# Altium PCB MCU_v2.PcbDoc
Units mm, origin at the board's own origin, x right, y up, seen from the top; angles counter-clockwise.
Board outline 60.75 x 70 mm, 4 copper layers (Top Layer, GND, +3V3, Bottom Layer), stack 1.513 mm thick; 73 components, 22 nets, 245 pads, 51 vias.
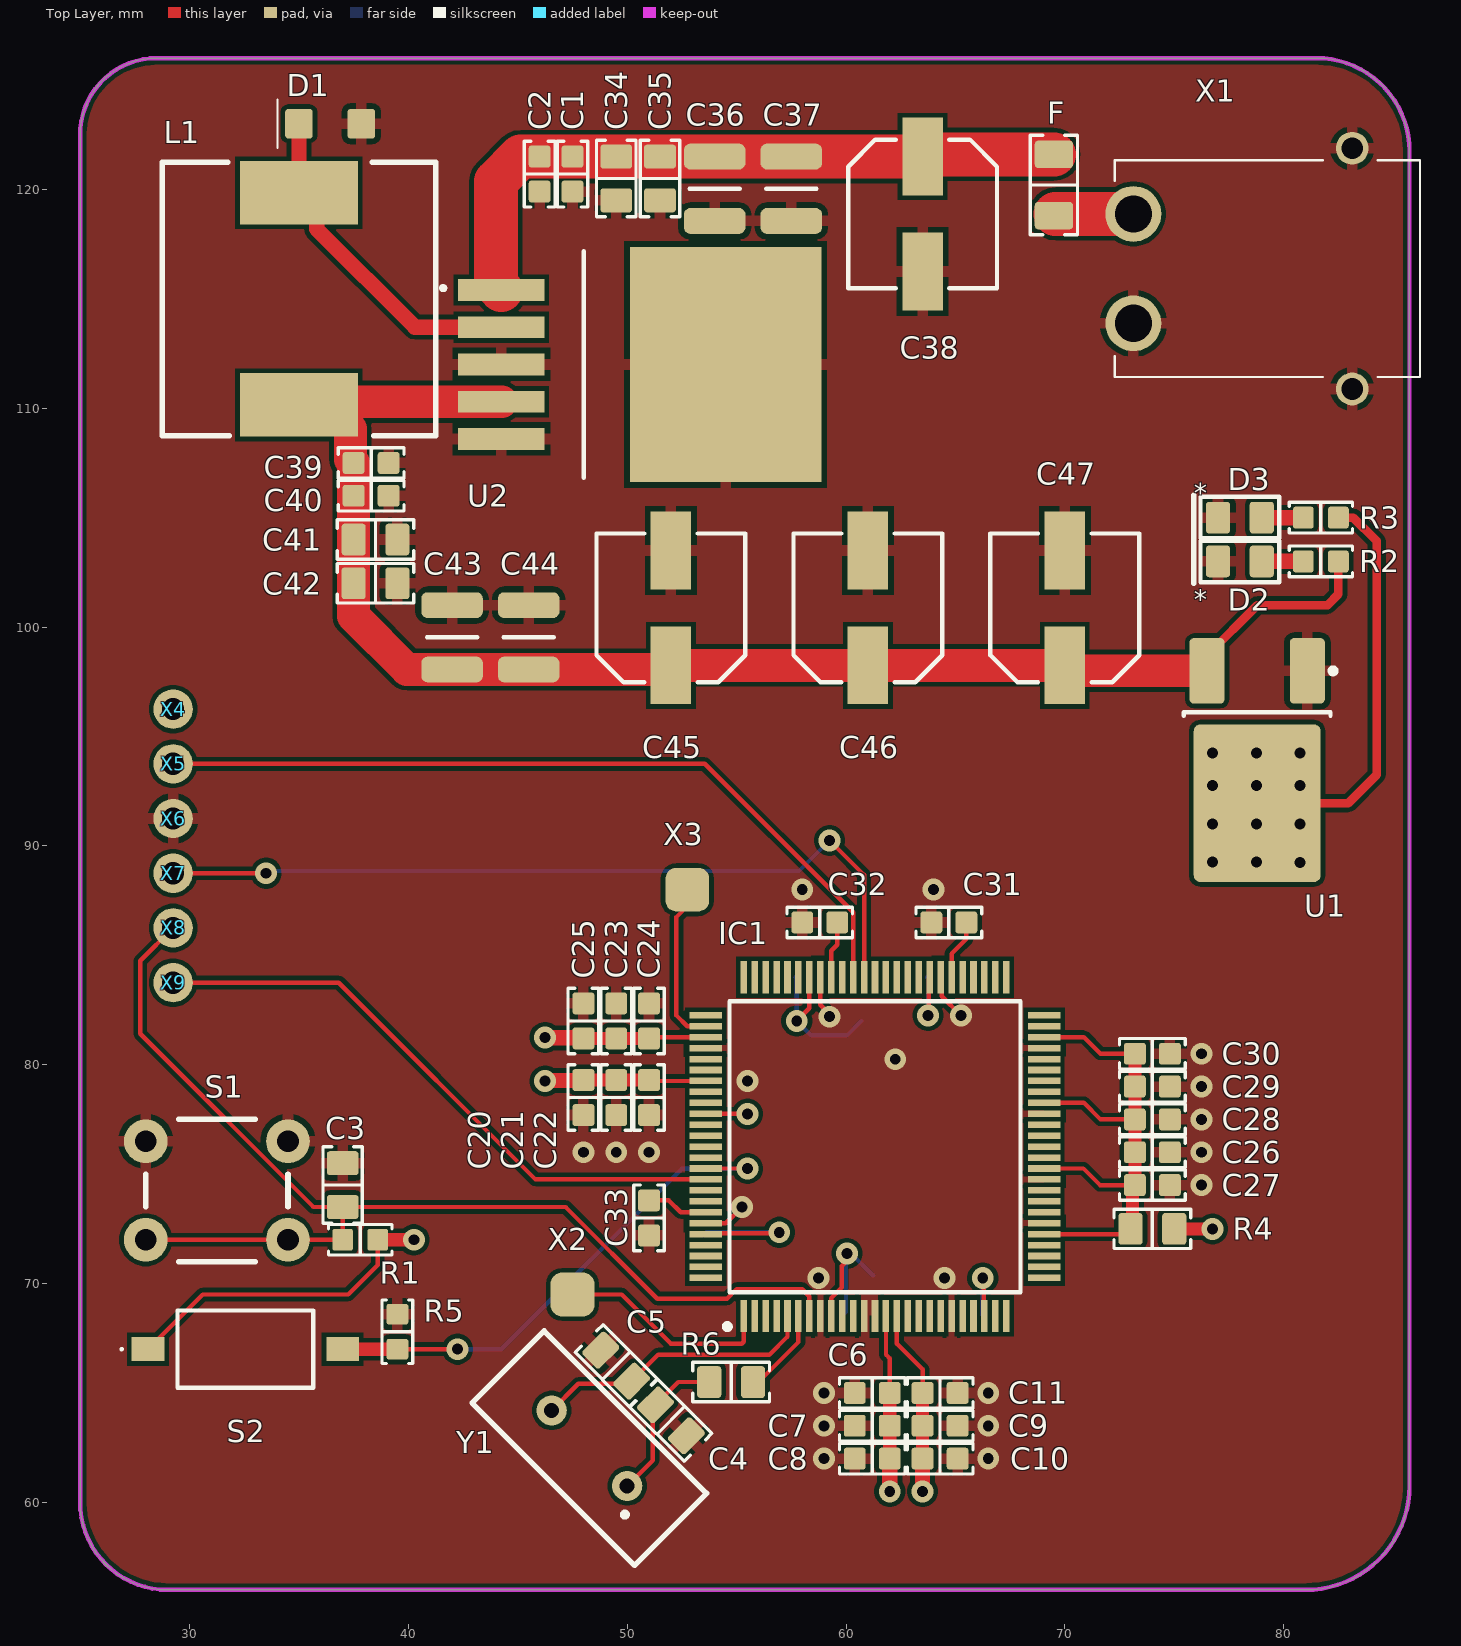
[diagram p0: Top Layer view]
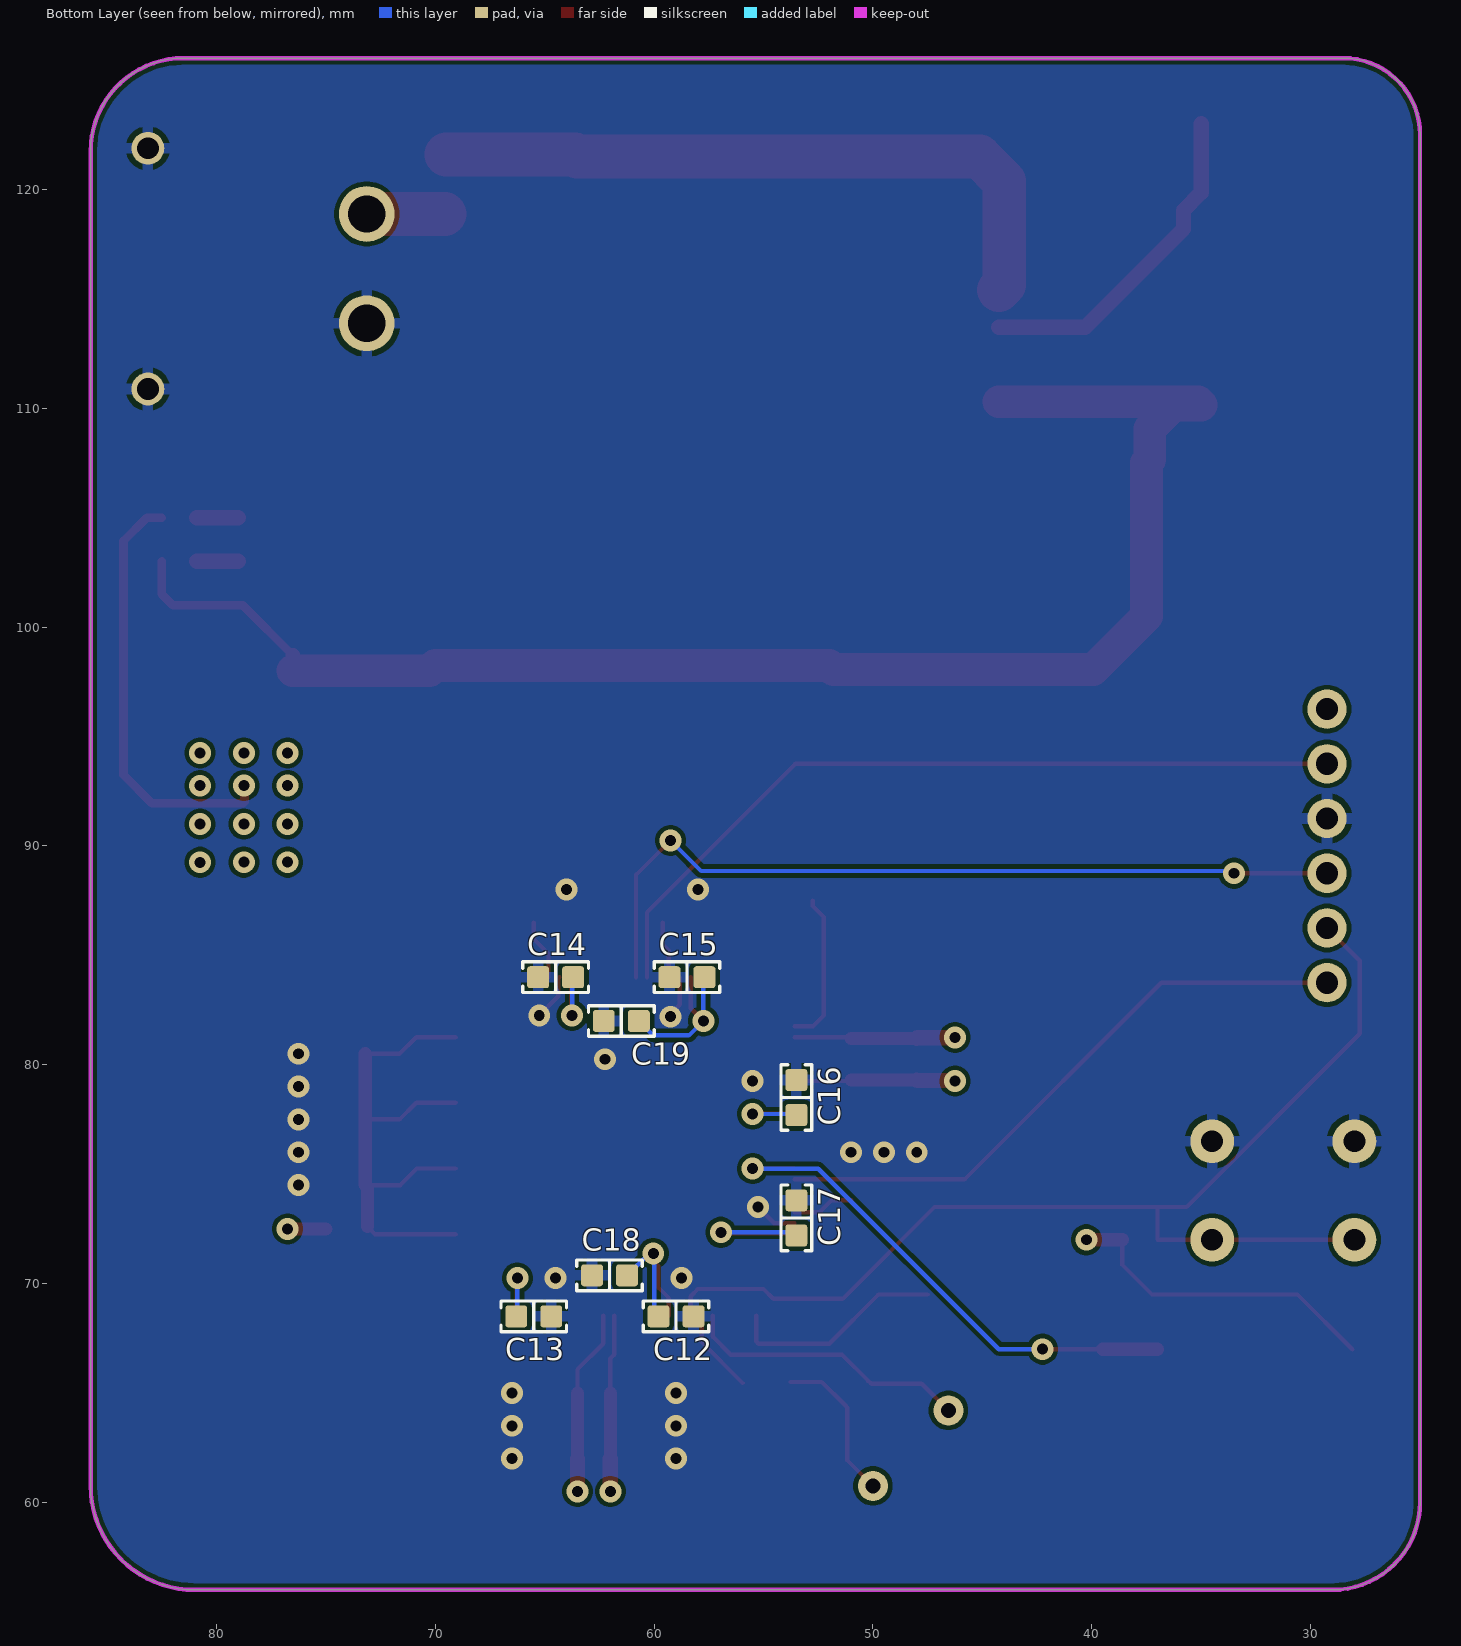
[diagram p1: Bottom Layer view, seen from below]
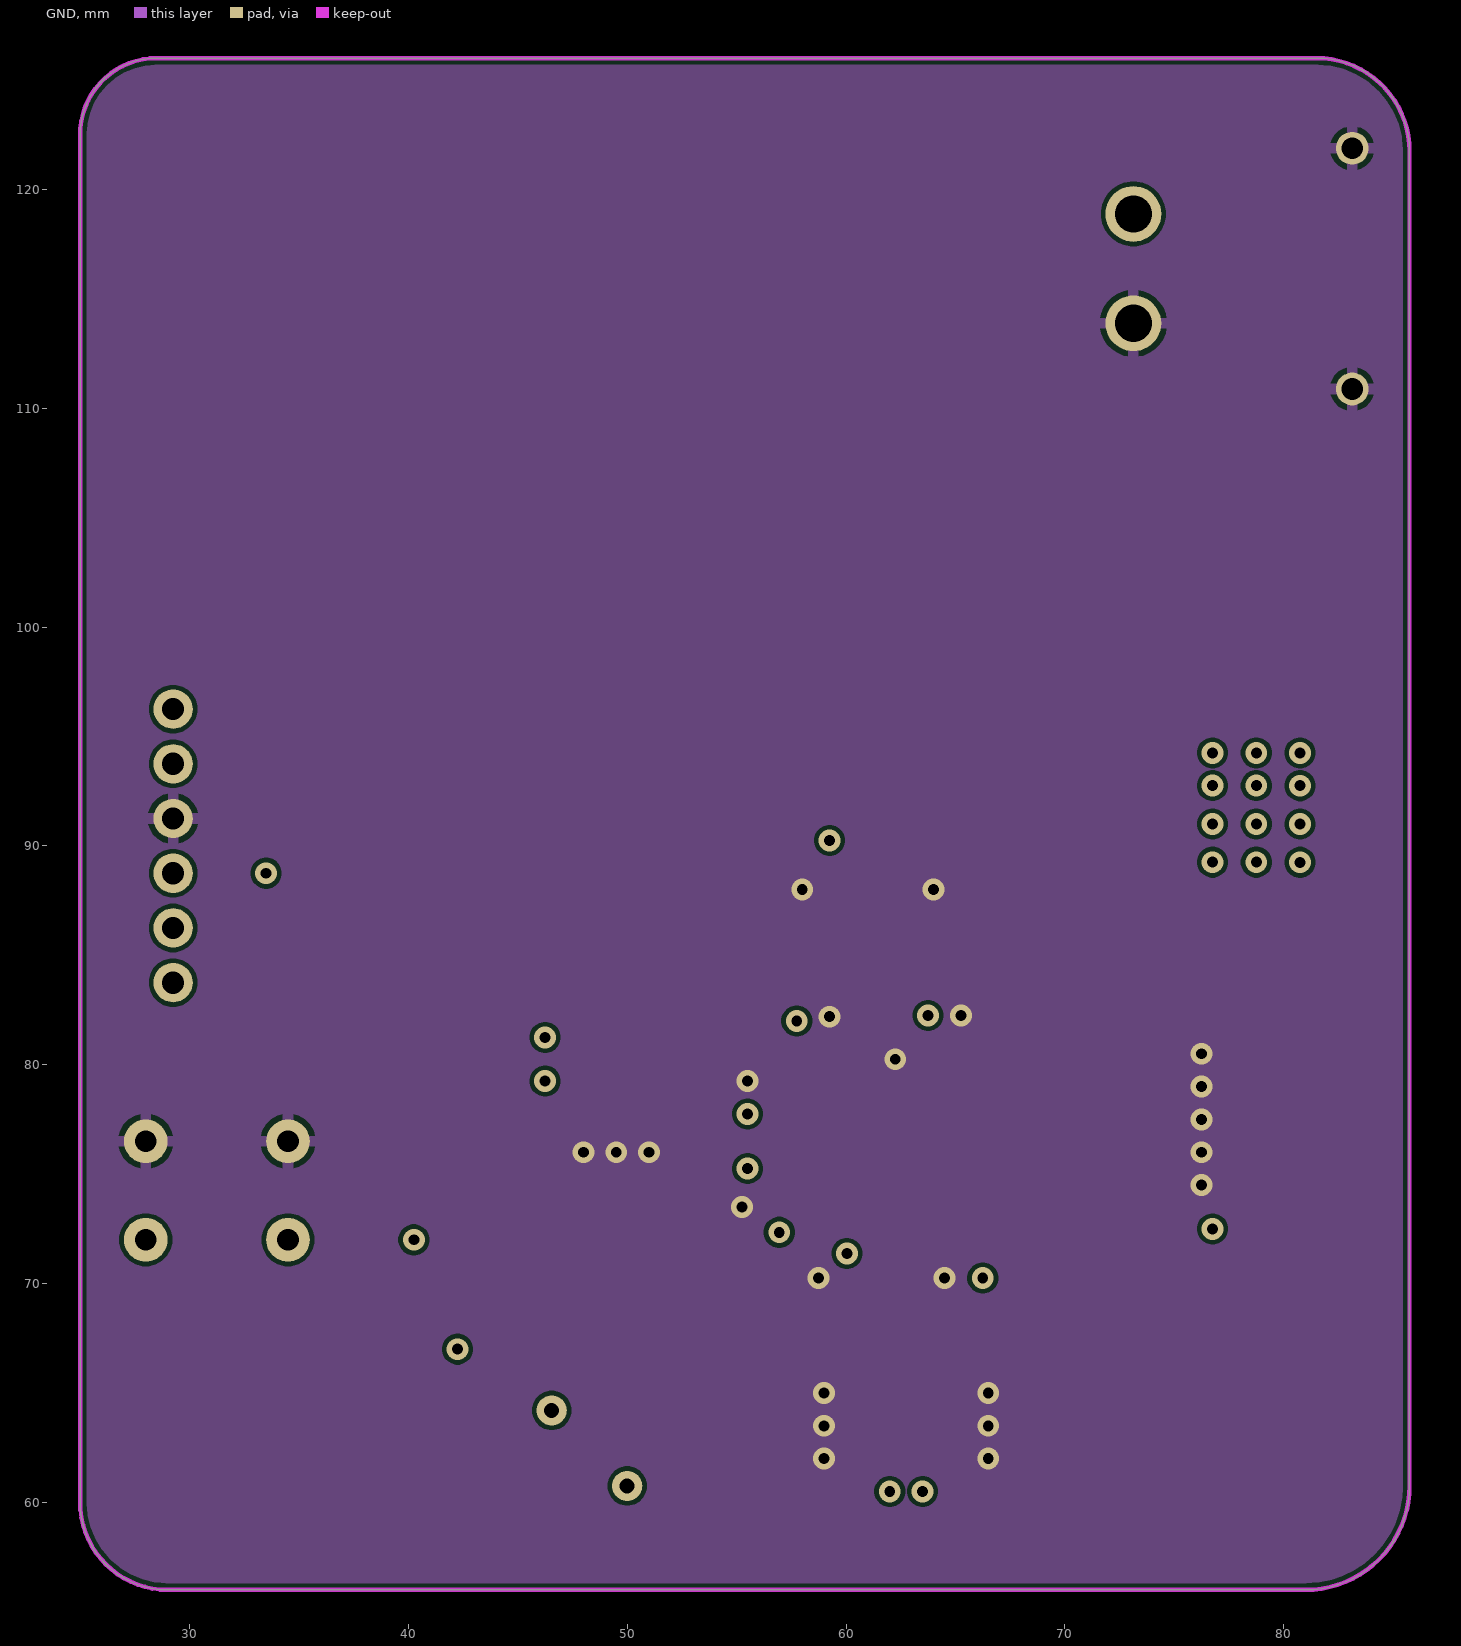
[diagram p2: GND]
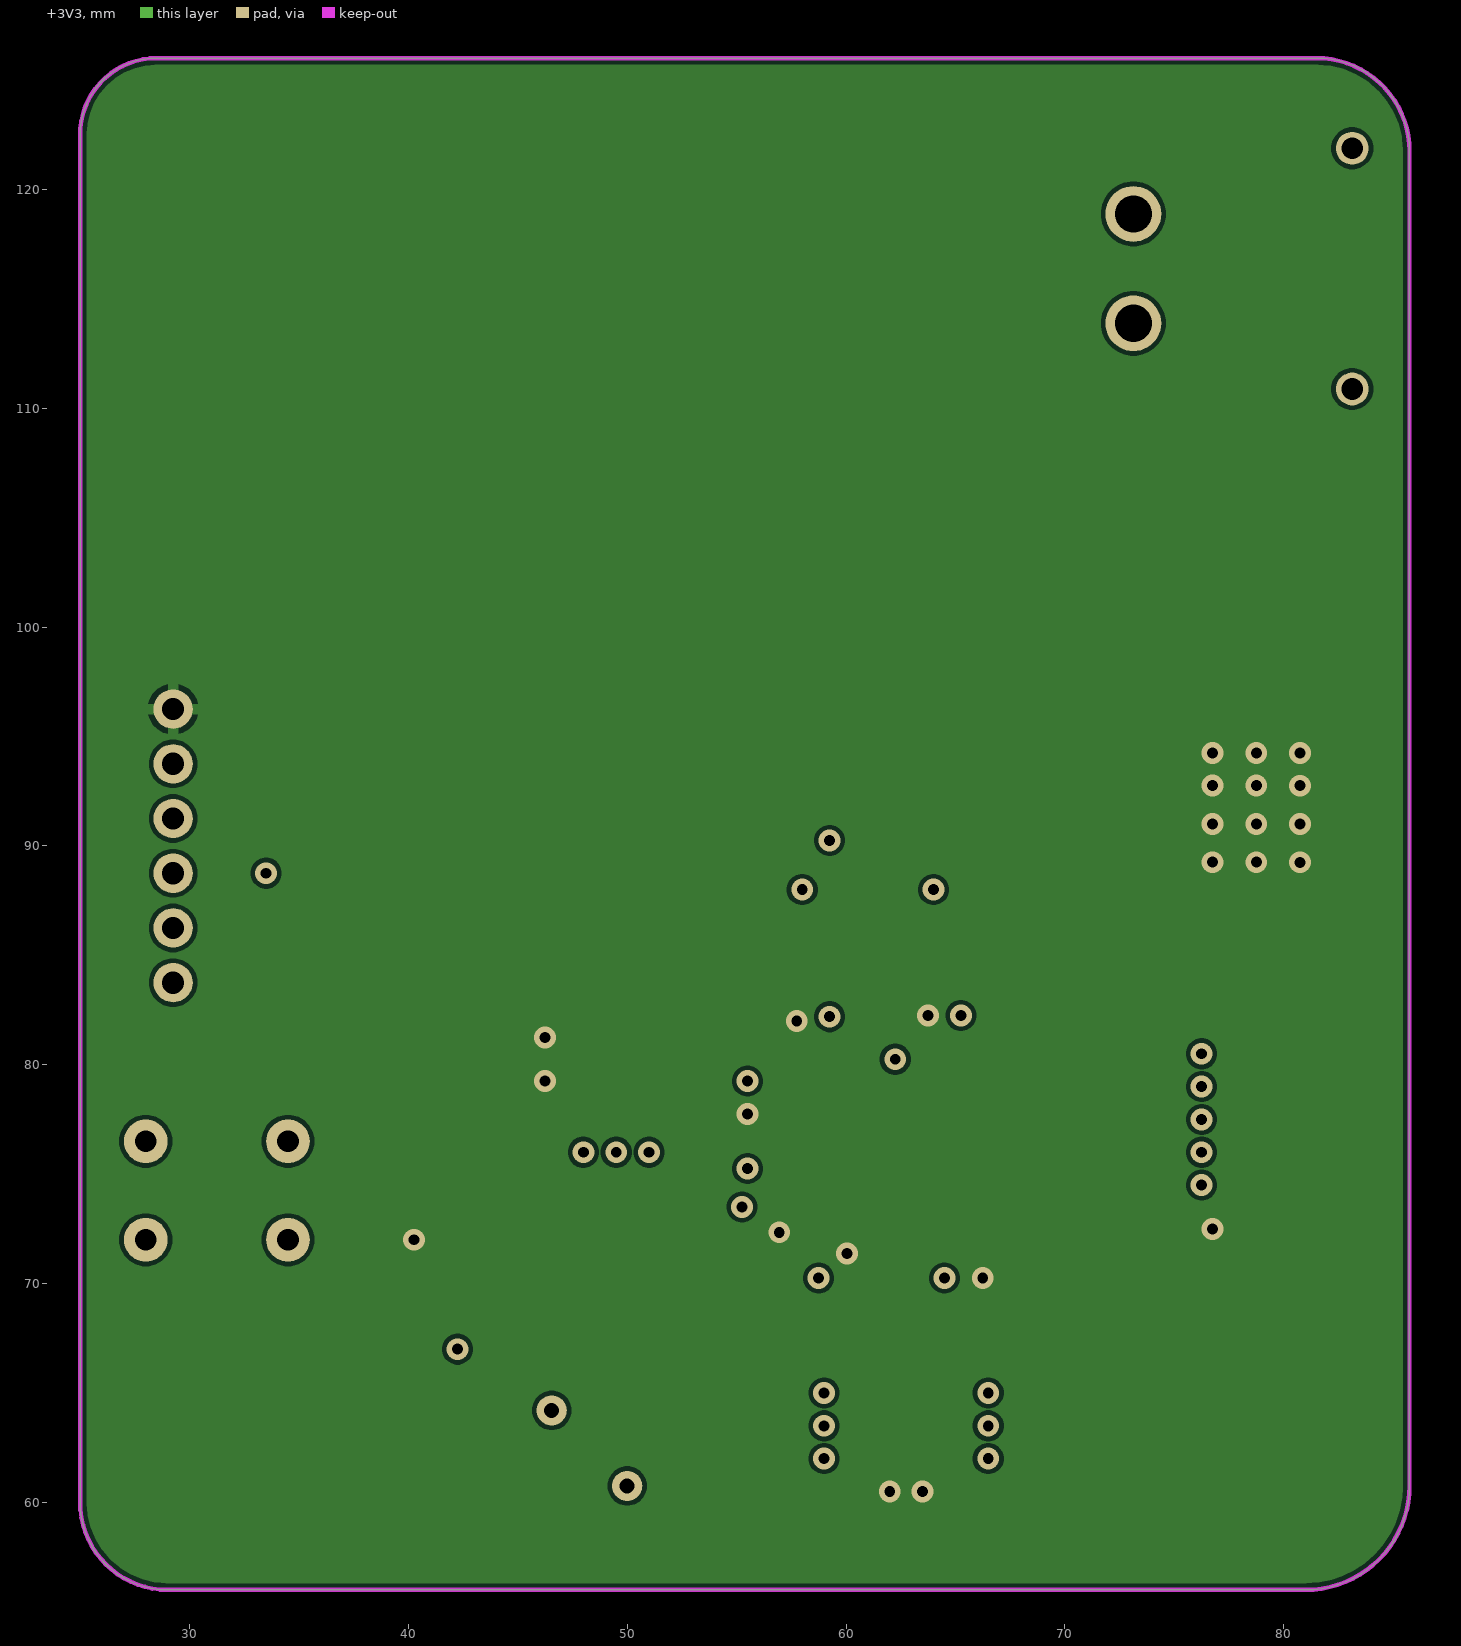
[diagram p3: +3V3]
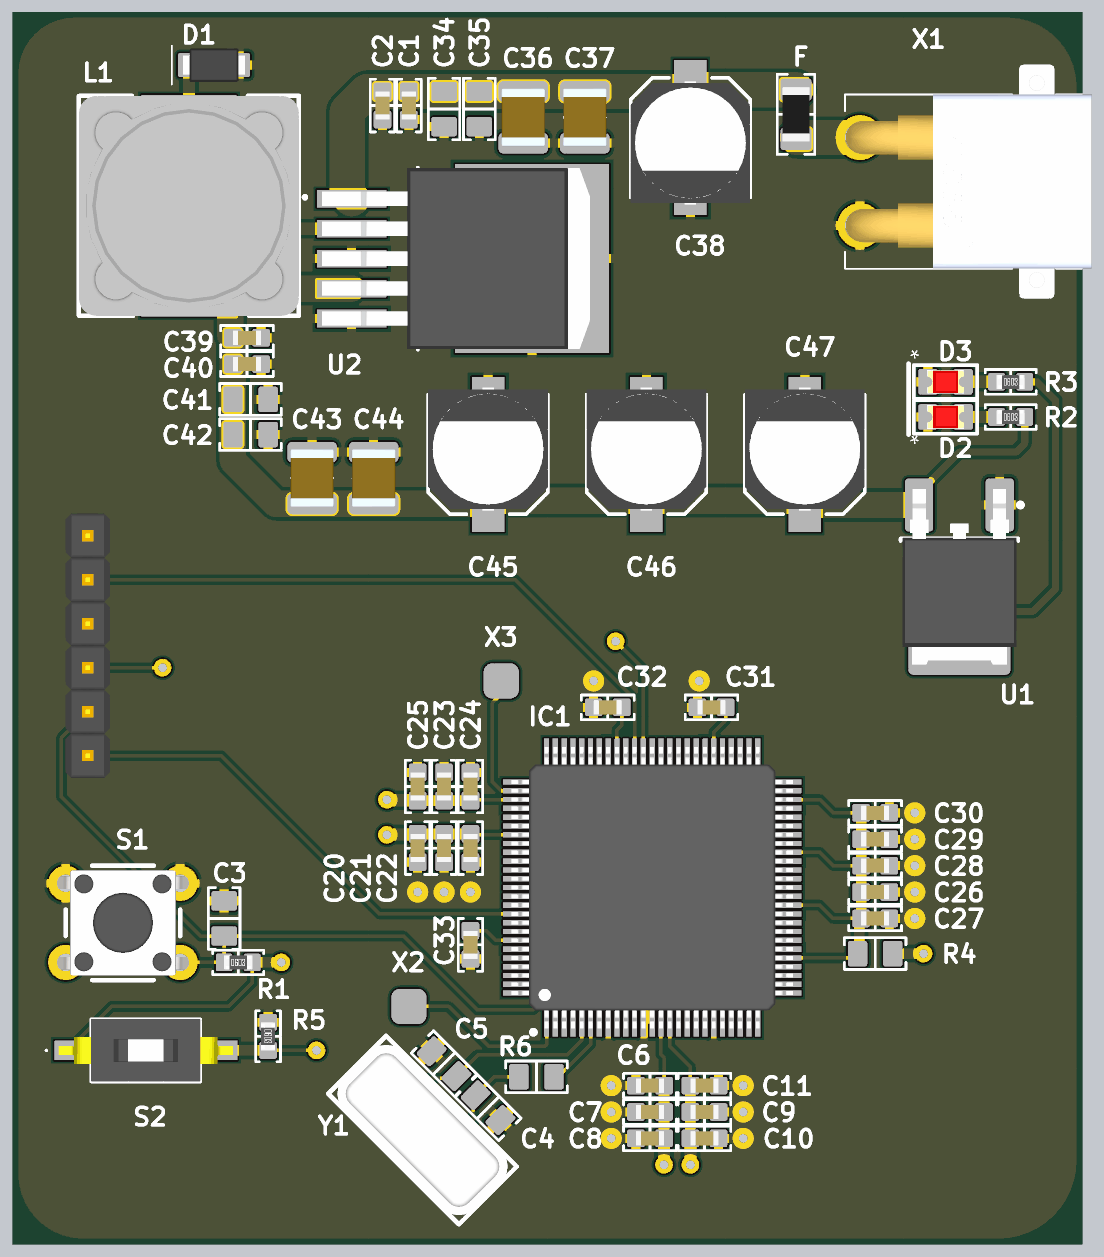
[diagram p4: 3D render of the assembled board from above, using the file's embedded part models]
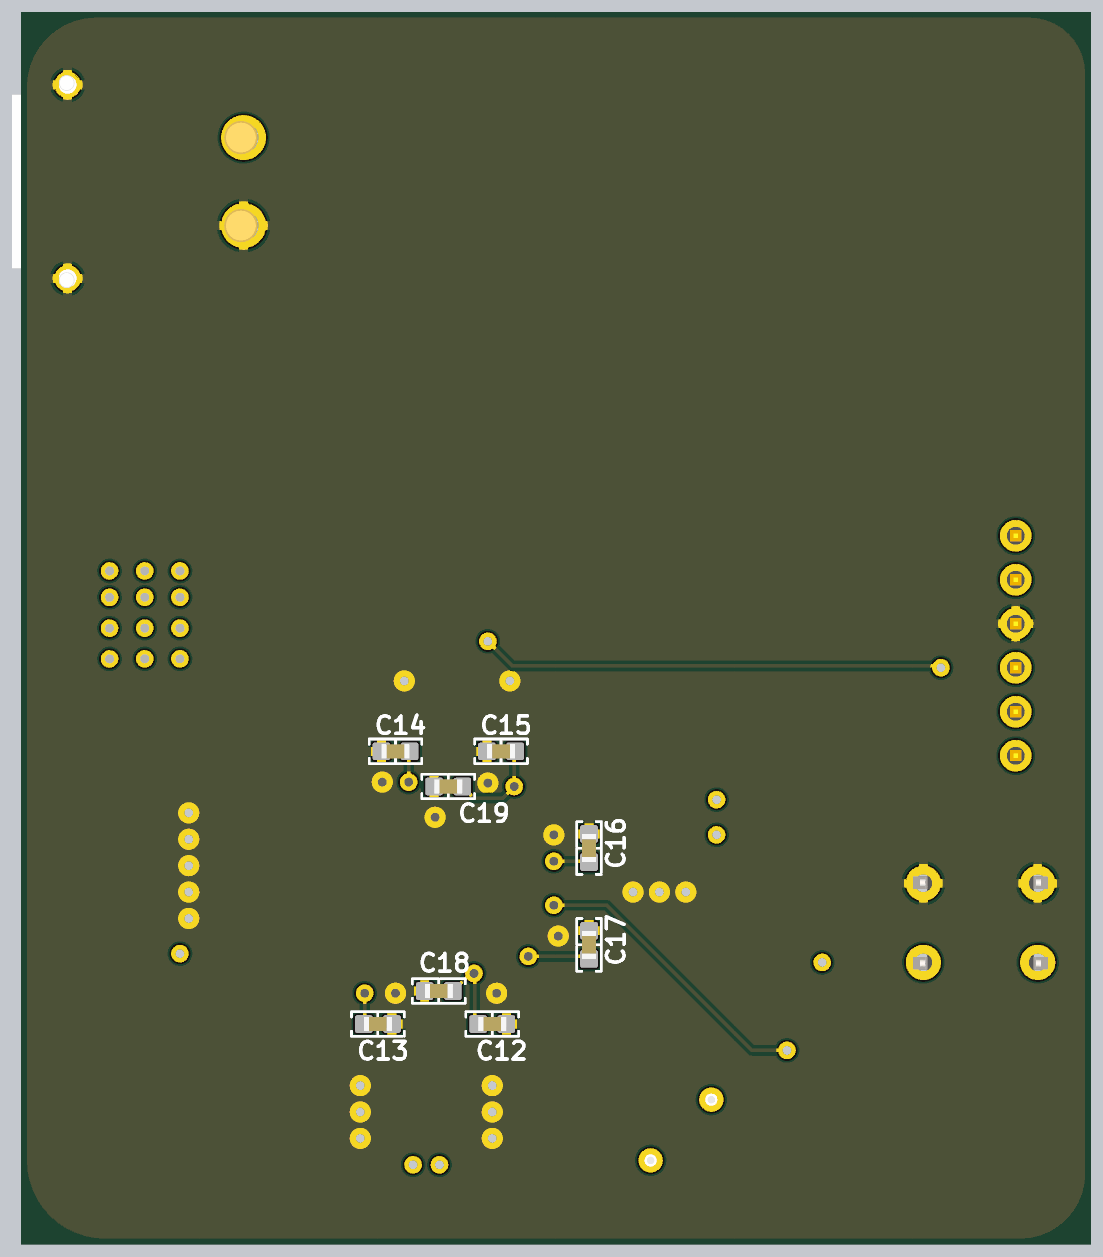
[diagram p5: 3D render of the assembled board from below, using the file's embedded part models]

## Layer stack, top to bottom
Top Solder: solder mask 0.0102, Solder Resist, Dk 3.5
Top Layer: signal copper 0.035
Dielectric 2: prepreg 0.2083, PP-022, Dk 4.5
GND: signal copper 0.018
Dielectric 1: core 0.9906, Core-042, Dk 4.6
+3V3: signal copper 0.018
Dielectric 3: prepreg 0.2083, PP-022, Dk 4.5
Bottom Layer: signal copper 0.035
Bottom Solder: solder mask 0.0102, Solder Resist, Dk 3.5

## Board outline
81.5,126 28.5,126 ccw(c28.5,122.5) 25,122.5 25,60 ccw(c29,60) 29,56 81,56 ccw(c81,60.75) 85.75,60.75 85.75,121.75 ccw(c81.5,121.75)

## Design rules (kind name [scope] priority, off if disabled: settings)
BoardOutlineClearance [All] p1: gap=0.3 ignorepadtopadclearanceinfootprint=FALSE except(0.4: Arc-SplitBarrior Arc-SplitContinuation Track-SplitBarrior Track-SplitContinuation SMDPad-SplitBarrior SMDPad-SplitContinuation THPad-SplitBarrior THPad-SplitContinuation Via-SplitBarrior Via-SplitContinuation Fill-SplitBarrior Fill-SplitContinuation Poly-SplitBarrior Poly-SplitContinuation Region-SplitBarrior Region-SplitContinuation Text-SplitBarrior Text-SplitContinuation)
Clearance "Clearance Different Nets" [All] p1: gap=0.2 ignorepadtopadclearanceinfootprint=FALSE except(0.089: Arc-Arc Arc-Track Arc-SMDPad Track-Track Track-SMDPad; 0.127: SMDPad-SMDPad SMDPad-Via THPad-Via Via-Via; 0.254: Arc-Via Arc-Text Track-Via Track-Text SMDPad-Text THPad-Text Via-Text Fill-Text Poly-Text Region-Text Text-Text; 0.5: THPad-THPad Via-Hole)
Clearance "Clearance Same Nets" [All] p2: gap=0.2 ignorepadtopadclearanceinfootprint=FALSE except(0.089: Arc-Arc Arc-Track Arc-SMDPad Track-Track Track-SMDPad SMDPad-SMDPad; 0.127: SMDPad-Via THPad-Via; 0.254: Arc-Via Arc-Text Track-Via Track-Text SMDPad-Text THPad-Text Via-Via Via-Text Fill-Text Poly-Text Region-Text Text-Text)
Clearance "Clearance Bottom Layer" [OnLayer('Bottom Layer')] p3: gap=0.203 ignorepadtopadclearanceinfootprint=TRUE except(0.254: Arc-Text Track-Text SMDPad-Text THPad-Text Via-Text Fill-Text Poly-Text Region-Text Text-Text)
Clearance "Clearance Top Layer" [OnLayer('Top Layer')] p4: gap=0.203 ignorepadtopadclearanceinfootprint=TRUE except(0.254: Arc-Text Track-Text SMDPad-Text THPad-Text Via-Text Fill-Text Poly-Text Region-Text Text-Text)
HoleSize [All] p1: absolutevalues=TRUE maxlimit=6.3 minlimit=0.2 maxpercent=80.000 minpercent=20.000
MinimumAnnularRing [All] p1: minimumring=0.13
MinimumSolderMaskSliver [All] p1: minsoldermaskwidth=0.1
PolygonConnect PolygonConnect_1 [All] p1: thpad.connectstyle=Relief thpad.reliefconductorwidth=0.508 thpad.reliefentries=4 thpad.polygonreliefangle="90 Angle" thpad.airgapwidth=0.254 smdpad.connectstyle=Relief smdpad.reliefconductorwidth=0.508 smdpad.reliefentries=4 smdpad.polygonreliefangle="90 Angle" smdpad.airgapwidth=0.254 via.connectstyle=Direct via.reliefconductorwidth=0.508 via.reliefentries=4 via.polygonreliefangle="90 Angle" via.airgapwidth=0.254
RoutingCorners [All] p1: cornerstyle=Round minsetback=2.54 maxsetback=2.54
RoutingVias [All] p1: holewidth=0.5 width=1 viastyle="Through Hole" minholewidth=0.2 minwidth=0.35 maxholewidth=1 maxwidth=2
SilkToSilkClearance [All] p1: silktosilkclearance=0.1
SilkToSolderMaskClearance [IsPad] p1: minsilkscreentomaskgap=0.1 clearancetoexposedcopper=TRUE
SolderMaskExpansion [All] p1: expansion=0.102 istentingtop=FALSE
Width [All] p1: maxlimit=2.54 minlimit=0.089 preferedwidth=0.381
25 further rules are at their usual default settings.

## Classes and differential pairs
component class MCU: C6 C7 C8 C9 C10 C11 C12 C13 C14 C15 C16 C17 C18 C19 C20 C21 C22 C23 C24 C25 C26 C27 C28 C29 C30 C31 C32 C33 IC1 R4 R5 S2 X2 X3 X4 X5 X6 X7 X8 X9
component class main_schematic: C1 C2 C3 C4 C5 C34 C35 C36 C37 C38 C39 C40 C41 C42 C43 C44 C45 C46 C47 D1 D2 D3 F L1 R1 R2 R3 R6 S1 U1 U2 X1 Y1

## Components (designator, comment, footprint, x,y, rotation, side; value= is the part's Value field where it differs from the comment)
C1 "Capacitor" 0603_CAP 47.5,120.7 r270 top value=0.1u
C2 "Capacitor" 0603_CAP 46,120.7 r270 top value=1u
C3 "Capacitor" 0805_CAP 37,74.5 r270 top value=0.1u
C4 "Capacitor" 0805_CAP 52,63.75 r135 top value=32p
C5 "Capacitor" 0805_CAP 49.5,66.25 r315 top value=32p
C6 "Capacitor" 0603_CAP 61.2,65 r0 top value=0.1u
C7 "Capacitor" 0603_CAP 61.2,63.5 r0 top value=1u
C8 "Capacitor" 0603_CAP 61.2,62 r0 top value=10n
C9 "Capacitor" 0603_CAP 64.3,63.5 r180 top value=0.1u
C10 "Capacitor" 0603_CAP 64.3,62 r180 top value=1u
C11 "Capacitor" 0603_CAP 64.3,65 r180 top value=10n
C12 "Capacitor" 0603_CAP 59,68.5 r0 bottom value=0.1u
C13 "Capacitor" 0603_CAP 65.5,68.5 r0 bottom value=0.1u
C14 "Capacitor" 0603_CAP 64.5,84 r180 bottom value=0.1u
C15 "Capacitor" 0603_CAP 58.5,84 r180 bottom value=0.1u
C16 "Capacitor" 0603_CAP 53.5,78.5 r270 bottom value=0.1u
C17 "Capacitor" 0603_CAP 53.5,73 r270 bottom value=0.1u
C18 "Capacitor" 0603_CAP 62.039,70.375 r180 bottom value=1u
C19 "Capacitor" 0603_CAP 61.5,82 r180 bottom value=1u
C20 "Capacitor" 0603_CAP 48,78.5 r90 top value=0.1u
C21 "Capacitor" 0603_CAP 49.5,78.5 r90 top value=1u
C22 "Capacitor" 0603_CAP 51,78.5 r90 top value=10n
C23 "Capacitor" 0603_CAP 49.5,82 r270 top value=0.1u
C24 "Capacitor" 0603_CAP 51,82 r270 top value=1u
C25 "Capacitor" 0603_CAP 48,82 r270 top value=10n
C26 "Capacitor" 0603_CAP 74,76 r180 top value=0.1u
C27 "Capacitor" 0603_CAP 74,74.5 r180 top value=0.1u
C28 "Capacitor" 0603_CAP 74,77.5 r180 top value=0.1u
C29 "Capacitor" 0603_CAP 74,79 r180 top value=1u
C30 "Capacitor" 0603_CAP 74,80.5 r180 top value=1u
C31 "Capacitor" 0603_CAP 64.7,86.5 r0 top value=2.2u
C32 "Capacitor" 0603_CAP 58.8,86.5 r0 top value=2.2u
C33 "Capacitor" 0603_CAP 51,73 r90 top value=2.2u
C34 "Capacitor" 0805_CAP 49.5,120.5 r270 top value=10u
C35 "Capacitor" 0805_CAP 51.5,120.5 r270 top value=10u
C36 "Capacitor" 1210_CAP 54,120.03 r270 top value=22u
C37 "Capacitor" 1210_CAP 57.5,120.03 r270 top value=22u
C38 "UWT1H470MCL1GS" 6.60x6.60x8.00mm_E_CAP 63.5,118.875 r270 top value=47u
C39 "Capacitor" 0603_CAP 38.3,107.5 r0 top value=0.1u
C40 "Capacitor" 0603_CAP 38.3,106 r0 top value=1u
C41 "Capacitor" 0805_CAP 38.5,104 r0 top value=10u
C42 "Capacitor" 0805_CAP 38.5,102 r0 top value=10u
C43 "Capacitor" 1210_CAP 42,99.53 r90 top value=22u
C44 "Capacitor" 1210_CAP 45.5,99.53 r90 top value=22u
C45 "UWT1H470MCL1GS" 6.60x6.60x8.00mm_E_CAP 52,100.875 r90 top value=47u
C46 "865080343009" 6.60x6.60x8.00mm_E_CAP 61,100.875 r90 top value=100u
C47 "865080343009" 6.60x6.60x8.00mm_E_CAP 70,100.875 r90 top value=100u
D1 "1N5819" SOD-123F 36.425,123 r0 top
D2 "0805_LED" 0805_LED 78,103 r180 top
D3 "0805_LED" 0805_LED 78,105 r180 top
F "Generic 1206 Fuse Chip" 1206_RES 69.5,120.2 r90 top
IC1 "STM32H7R3V8T6" QFP50P1600X1600X160-100N 61.326,76.258 r90 top
L1 "SRR1280-331K" SRR1280-150M 35,115 r90 top
R1 "Resistor" 0603_RES 37.8,72 r0 top value=10k
R2 "Resistor" 0603_RES 81.7,103 r0 top value=330
R3 "Resistor" 0603_RES 81.7,105 r0 top value=130
R4 "Resistor" 0805_RES 74,72.5 r180 top value=0
R5 "Resistor" 0603_RES 39.5,67.8 r270 top value=10k
R6 "Resistor" 0805_RES 54.75,65.5 r0 top value=620
S1 "TactileSwitch" 6mmTactileSwitch_ThroughHole 28,72 r0 top
S2 "DS04-254-2-01BK-SMT-TR" DS04254201BKSMTTR 32.55,67 r270 top
U1 "" DPAK3_TO-252-3 78.79,93.9 r270 top
U2 "LM2576-5.0WU" MICROCHIP_TO-263 56.779,112 r0 top
X1 "XT30PW-M" XT30PWM 79.045,116.379 r270 top
X2 "HeaderPad" HeaderPad 47.5,69.5 r90 top
X3 "HeaderPad" HeaderPad 52.75,88 r90 top
X4 "GenericPinHeader(0.1in)" GenericPinHeader(.1in) 29.25,96.25 r0 top
X5 "GenericPinHeader(0.1in)" GenericPinHeader(.1in) 29.25,93.75 r0 top
X6 "GenericPinHeader(0.1in)" GenericPinHeader(.1in) 29.25,91.25 r0 top
X7 "GenericPinHeader(0.1in)" GenericPinHeader(.1in) 29.25,88.75 r0 top
X8 "GenericPinHeader(0.1in)" GenericPinHeader(.1in) 29.25,86.25 r0 top
X9 "GenericPinHeader(0.1in)" GenericPinHeader(.1in) 29.25,83.75 r0 top
Y1 "ECS-80-18-4XDN" ECS-80-18 50,60.75 r135 top

## Footprints (in the part's own frame and the unit in brackets; to place one, negate y for a bottom-side part, rotate by r counter-clockwise, add the part's x,y. Pads: shape width x height; smd on the part's side, far side on the other; paste and mask are expansions set on the pad)
6.60x6.60x8.00mm_E_CAP [mm] "Aluminum Electrolytic Capacitor, Body 6.60x6.60x8.00mm, IPC Low Density"
  rect 3.55x1.85 smd: 1(-2.625,0) 2(2.625,0)
  silkscreen extent -3.4,-3.4 3.4,3.4, body extent -3.2,-3.4 3.8,3.4, height 8
6mmTactileSwitch_ThroughHole [mm]
  round 2 hole 1: 1(0,4.5) 2(6.5,4.5) 3(0,0) 4(6.5,0)
  silkscreen extent 0,-1 6.5,5.5, body extent -0.6,-0.75 7.1,5.25, height 4.95
0603_CAP [mm]
  rrect25% 1x1 smd: 1(-0.8,0) 2(0.8,0)
  silkscreen extent -1.5,-0.7 1.5,0.7, body extent -0.8,-0.41 0.8,0.41, height 0.82
0603_RES [mm] "Chip Resistor, 2-Leads, Body 1.60x0.80mm, IPC Medium Density"
  rrect25% 0.95x1 smd: 1(-0.8,0) 2(0.8,0)
  silkscreen extent -1.45,-0.7 1.45,0.7, body extent -0.8,-0.4 0.8,0.4, height 0.45
0805_CAP [mm] "Chip Capacitor, Body 3.2x1.6mm, Height 1.9mm, IPC Low Density"
  rrect25% 1.1x1.45 smd: 1(-1,0) 2(1,0)
  silkscreen extent -1.75,-0.9 1.75,0.9, body extent -1.1,-0.65 1.1,0.65, height 1.1
0805_LED [mm]
  rrect25% 1.1x1.45 smd: 1(-1,0) 2(1,0)
  silkscreen extent -1.8,-1.03 2.1,1, body extent -1.05,-0.67 1.05,0.68, height 0.9
0805_RES [mm] "Chip Resistor, 2-Leads, Body 2.00x1.25mm, IPC Medium Density"
  rrect25% 1.1x1.45 smd: 1(-1,0) 2(1,0)
  silkscreen extent -1.75,-0.9 1.75,0.9, body extent -1.1,-0.72 1.1,0.72, height 0.5
1206_RES [mm]
  rrect25% 1.25x1.75 smd: 1(-1.4,0) 2(1.4,0)
  silkscreen extent -2.27,-1.07 2.27,1.07, body extent -1.55,-0.77 1.55,0.78, height 0.55
1210_CAP [mm]
  rrect50% 1.18x2.82 smd: 1(-1.47,0) 2(1.47,0)
  silkscreen extent 0,-1.15 0,1.15, body extent -1.65,-1.25 1.65,1.25, height 0.94
DPAK3_TO-252-3 [mm] "D-PAK, 3-Pads, Body 6.21x6.73mm (max), IPC Medium Density"
  rrect25% 3x1.6 smd: 1(-4.1,2.29) 3(-4.1,-2.29)
  rrect10% 7.2x5.8 smd: 4(1.95,0)
  silkscreen extent -4.22,-3.35 -2.05,3.59, body extent -5,-3.25 4.98,3.25, height 2.5
DS04254201BKSMTTR [mm]
  rect 1.1x1.5 smd: 1(0,-4.45) 2(0,4.45)
  silkscreen extent -1.77,-5.7 1.77,3.1, body extent -1.77,-4.95 1.77,4.95, height 3.96
ECS-80-18 [mm]
  round 1.38 hole 0.68: 1(0,0) 2(4.88,0)
  silkscreen extent -2.81,-2.33 7.69,2.33, body extent -2.81,-2.33 7.69,2.33, height 3.5
GenericPinHeader(.1in) [mm] "Generic .1in (2.54mm) pin header"
  round 1.8 hole 1.016: 1(0,0)
  body extent -1.27,-1.27 1.27,1.27, height 9.5
HeaderPad [mm]
  rrect50% 2x2 smd: 1(0,0)
MICROCHIP_TO-263 [mm]
  rect 3.95x1 smd: 1(-12.529,3.404) 2(-12.529,1.702) 3(-12.529,0) 4(-12.529,-1.702) 5(-12.529,-3.404)
  rect 8.75x10.75 smd: 6(-2.279,0)
  silkscreen extent -15.27,-5.18 -8.77,5.18, body extent -14.22,-5.14 1.02,5.14, height 4.57
QFP50P1600X1600X160-100N [mm]
  rect 1.475x0.3 smd: 1(-7.738,6) 2(-7.738,5.5) 3(-7.738,5) 4(-7.738,4.5) 5(-7.738,4) 6(-7.738,3.5) 7(-7.738,3) 8(-7.738,2.5) 9(-7.738,2) 10(-7.738,1.5) 11(-7.738,1) 12(-7.738,0.5) 13(-7.738,0) 14(-7.738,-0.5) 15(-7.738,-1) 16(-7.738,-1.5) 17(-7.738,-2) 18(-7.738,-2.5) 19(-7.738,-3) 20(-7.738,-3.5) 21(-7.738,-4) 22(-7.738,-4.5) 23(-7.738,-5) 24(-7.738,-5.5) 25(-7.738,-6) 51(7.738,-6) 52(7.738,-5.5) 53(7.738,-5) 54(7.738,-4.5) 55(7.738,-4) 56(7.738,-3.5) 57(7.738,-3) 58(7.738,-2.5) 59(7.738,-2) 60(7.738,-1.5) 61(7.738,-1) 62(7.738,-0.5) 63(7.738,0) 64(7.738,0.5) 65(7.738,1) 66(7.738,1.5) 67(7.738,2) 68(7.738,2.5) 69(7.738,3) 70(7.738,3.5) 71(7.738,4) 72(7.738,4.5) 73(7.738,5) 74(7.738,5.5) 75(7.738,6)
  rect 0.3x1.475 smd: 26(-6,-7.738) 27(-5.5,-7.738) 28(-5,-7.738) 29(-4.5,-7.738) 30(-4,-7.738) 31(-3.5,-7.738) 32(-3,-7.738) 33(-2.5,-7.738) 34(-2,-7.738) 35(-1.5,-7.738) 36(-1,-7.738) 37(-0.5,-7.738) 38(0,-7.738) 39(0.5,-7.738) 40(1,-7.738) 41(1.5,-7.738) 42(2,-7.738) 43(2.5,-7.738) 44(3,-7.738) 45(3.5,-7.738) 46(4,-7.738) 47(4.5,-7.738) 48(5,-7.738) 49(5.5,-7.738) 50(6,-7.738) 76(6,7.738) 77(5.5,7.738) 78(5,7.738) 79(4.5,7.738) 80(4,7.738) 81(3.5,7.738) 82(3,7.738) 83(2.5,7.738) 84(2,7.738) 85(1.5,7.738) 86(1,7.738) 87(0.5,7.738) 88(0,7.738) 89(-0.5,7.738) 90(-1,7.738) 91(-1.5,7.738) 92(-2,7.738) 93(-2.5,7.738) 94(-3,7.738) 95(-3.5,7.738) 96(-4,7.738) 97(-4.5,7.738) 98(-5,7.738) 99(-5.5,7.738) 100(-6,7.738)
  silkscreen extent -8.35,-6.65 6.65,6.87, body extent -8,-8 8,8, height 1.56
SOD-123F [mm] "SODFL, 2-Leads, Body 1.80x3.50mm, IPC Medium Density"
  rrect20% 1.25x1.35 smd: 1(-1.425,0) 2(1.425,0)
  silkscreen extent -2.4,-1.1 -2.4,1.1, body extent -1.75,-0.95 1.75,0.95, height 1.15
SRR1280-150M [mm]
  rect 2.9x5.4 smd: 1(-4.85,0) 2(4.85,0)
  silkscreen extent -6.25,-6.25 6.25,6.25, body extent -6.25,-6.25 6.25,6.25, height 7.5
XT30PWM [mm]
  round 2.55 hole 1.7: GND(2.5,-5.912) VIN(-2.5,-5.912)
  round 1.5 hole 1: MOUNT(-5.5,4.088) MOUNT(5.5,4.088)
  silkscreen extent -4.95,-6.76 4.95,7.19, body extent -6.65,-6.71 6.65,7.24, height 5.06

## Part data
C1 C2 C6 C7 C8 C9 C10 C11 C12 C13 C14 C15 C16 C17 C18 C19 C20 C21 C22 C23 C24 C25 C26 C27 C28 C29 C30 C31 C32 C33 C34 C35 C36 C37 C39 C40 C41 C42 C43 C44: Voltage=16V
C38 C45: Percent Tolerance=20, ComponentLink1Description=Digikey, ComponentLink1URL=https://www.digikey.com/product-detail/en/nichicon/UWT1H470MCL1GS/493-2225-1-ND/590200
C46 C47: "CAP ALUM 100UF 20% 16V SMD", Percent Tolerance=20, ComponentLink1Description=Digikey, ComponentLink1URL=https://www.digikey.com/en/products/detail/w%C3%BCrth-elektronik/865080343009/5728014
D1: "Diode Super Barrier 40V 1A Surface Mount SOD-123F", Package=SOD-123F, ComponentLink1Description=Digikey, ComponentLink1URL=https://www.digikey.com/product-detail/en/diodes-incorporated/1N5819HW1-7-F/1N5819HW1-7-FDITR-ND/5768523, Num_Circuits=1, Vr=40V
D2 D3: "Generic 0805 LED"
IC1: "IC MCU 32BIT 64KB FLASH 100LQFP", Manufacturer_Name=STMicroelectronics, Datasheet Link=https://www.st.com/resource/en/datasheet/stm32h7r3a8.pdf, Height=1.6mm, Manufacturer_Part_Number=STM32H7R3V8T6
L1: "Power Inductors - SMD 330uH 10% SMD 1280", Inductance=330uH, MfrPartNo=652-SRR1280-331K, Package=5050, Resistance=600mOhm, iMax=1.1A, Link=https://www.mouser.com/ProductDetail/Bourns/SRR1280-331K?qs=brMhP%2FMjUfd0KI3Wq6D0xQ%3D%3D, Name=SRR1280-331K
S1: "Generic 6mm Through Hole Tactile Switch", Current=0.05A, MaxVoltage=12V, ComponentLink1Description=Digikey, ComponentLink1URL=https://www.digikey.com/en/products/detail/c-k/PTS645SH95-2-LFS/1146763, Mounting=TH, Name=TactileSwitch, Pole=1
S2: "DIP Switches / SIP Switches DIP Switch, SPST, 2.54 pitch, flat actuator, SMT, Tape and reel, 1 position, Black", Manufacturer_Name="CUI Devices", Mouser Part Number=490-DS04254201BK-STR, Arrow Part Number=DS04-254-2-01BK-SMT-TR, Arrow Price/Stock=https://www.arrow.com/en/products/ds04-254-2-01bk-smt-tr/cui-devices?region=nac, Datasheet Link=https://www.cuidevices.com/product/resource/supplyframepdf/ds04-254-smt.pdf, Height=4.3mm, Manufacturer_Part_Number=DS04-254-2-01BK-SMT-TR, Mouser Price/Stock=https://www.mouser.co.uk/ProductDetail/CUI-Devices/DS04-254-2-01BK-SMT-TR?qs=wnTfsH77Xs4xXRFXKF0ssg%3D%3D
U1: library part NCP1117DT33T5G, "IC REG LINEAR 3.3V 1A DPAK"
U2: "Switching Voltage Regulators 3A Step-Down SMPS Regulator", Manufacturer_Name=Microchip, Mouser Part Number=998-LM2576-5.0WU, Arrow Part Number=LM2576-5.0WU, Arrow Price/Stock=https://www.arrow.com/en/products/lm2576-5.0wu/microchip-technology?region=nac, Datasheet Link=http://ww1.microchip.com/downloads/en/DeviceDoc/lm2576.pdf, Manufacturer_Part_Number=LM2576-5.0WU, Mouser Price/Stock=https://www.mouser.co.uk/ProductDetail/Microchip-Technology/LM2576-5.0WU?qs=kh6iOki%2FeLHlI9xhWDTjJw%3D%3D
X1: "Socket; DC supply; XT30; male; PIN: 2; on PCBs; THT; yellow; 15A; 500V", Manufacturer_Name=Amass, Datasheet Link=https://www.tme.eu/sl/Document/ce4077e36b79046da520ca73227e15de/XT30PW%20SPEC.pdf, Height=5mm, Manufacturer_Part_Number=XT30PW-M
X2 X3: "Pad for pin header"
X4 X5 X6 X7 X8 X9: "Generic .1in(2.54mm) pitch pin header"
Y1: "Crystals 8MHz 18pF EX/TEMP HC-49US", ComponentLink1Description=Mouser, ComponentLink1URL=https://www.mouser.com/ProductDetail/ECS/ECS-80-18-4XDN?qs=CkbNAJEAr%2FRohZNNeAgxsQ%3D%3D

## Via types
v1: diameter 1, hole 0.5, Top Layer to Bottom Layer, 51 vias

## Nets (pads, with @x,y where several pads share a name; then routed paths per layer and width w, separated by ;. In a path a pad name is that pad's centre, name@x,y a point inside that pad or via, vN(x,y) a via of type N, cw(c..) or ccw(c..) an arc to the next point about the centre after c; other vN are vias at no path point)
+3V3: C6.2 C7.2 C8.2 C9.2 C10.2 C11.2 C12.2 C13.2 C14.2 C15.2 C16.2 C17.2 C18.2 C19.2 C20.2 C21.2 C22.2 C23.2 C24.2 C25.2 IC1.9 IC1.14 IC1.15 IC1.23 IC1.58 IC1.69 IC1.78 IC1.82 IC1.85 IC1.96 R1.2 R3.2 R4.1 S2.1 U1.4 X4.1 | length 100.5
  Top Layer w0.2: S2.1 30.6,69.5 37.25,69.5 38.6,70.85 R1.2 ; C22.2 51.042,79.258 IC1.82 ; C24.2 51.058,81.258 IC1.78 ; IC1.96 53.63,72.3 56.908,72.3 v1(56.95,72.342) ; IC1.85 55.492,77.758 v1(55.5,77.75) ; v1(57.75,82) 58.326,82.576 IC1.69 ; IC1.9 59.326,69.335 59.804,69.813 59.804,70.804 v1@60,71 ; IC1.14 61.826,66.752 62,66.578 C6.2 ; IC1.15 62.326,67.252 63.5,66.078 C11.2 ; v1(63.75,82.25) 63.788,82.288 63.788,83.958 IC1.58 ; v1(66.25,70.25) 66.288,70.212 66.288,68.558 IC1.23
  Top Layer w0.4: U1.4@78.721,92.901 78.721,92.019 U1.4 82.95,91.95 84.25,93.25 84.25,103.933 83.183,105 R3.2
  Top Layer w0.6: R1.2 v1(40.25,72) ; C20.2 C21.2 C22.2 ; C25.2 C23.2 C24.2 ; C8.2 C7.2 C6.2 ; C10.2 C9.2 C11.2 ; R4.1 v1(76.75,72.5)
  Top Layer w0.7: v1(46.25,79.25) 46.275,79.275 47.975,79.275 C20.2 ; v1(46.25,81.25) 46.275,81.225 47.975,81.225 C25.2 ; v1(62,60.5) C8.2 ; v1(63.5,60.5) C10.2
  Bottom Layer w0.2: C17.2 53.642,72.342 v1(56.95,72.342) ; C16.2 53.55,77.75 v1(55.5,77.75) ; C15.2 57.75,83.95 v1(57.75,82) 58.41,81.34 60.04,81.34 C19.2 ; C12.2 60,68.7 v1@60,71 ; v1(60.039,71.375) 60.225,71.375 61.225,70.375 C18.2 ; C14.2 63.75,83.95 v1(63.75,82.25) ; v1(66.25,70.25) 66.25,68.55 C13.2
  other v1: 76.75,89.254 78.75,89.254 80.75,89.25 76.75,91 78.75,91 80.75,90.996 76.75,92.754 78.75,92.754 80.75,92.75 76.75,94.25 78.75,94.25 80.75,94.25
+5: C39.1 C40.1 C41.1 C42.1 C43.1 C44.1 C45.1 C46.1 C47.1 L1.1 R2.2 U1.3 U2.4 | length 70.3
  Top Layer w0.4: U1.3@76.5,98.7 78.8,101 82,101 82.5,101.5 R2.2
  Top Layer w0.7: U1.3 U1.3@76.5,98.7
  Top Layer w1.5: U2.4 35.148,110.298 L1.1 36.25,110.15 37.35,109.05 37.35,107.65 C39.1 C40.1 C41.1 C42.1 37.5,100.5 39.94,98.06 C43.1 C44.1 51.81,98.06 C45.1 C46.1 C47.1 70.25,98 U1.3
GND: C1.2 C2.2 C3.1 C4.1 C5.1 C6.1 C7.1 C8.1 C9.1 C10.1 C11.1 C12.1 C13.1 C14.1 C15.1 C16.1 C17.1 C18.1 C19.1 C20.1 C21.1 C22.1 C23.1 C24.1 C25.1 C26.1 C27.1 C28.1 C29.1 C30.1 C31.1 C32.1 C33.1 C34.2 C35.2 C36.2 C37.2 C38.2 C39.2 C40.2 C41.2 C42.2 C43.2 C44.2 C45.2 C46.2 C47.2 D1.2 D2.2 D3.2 IC1.8 IC1.12 IC1.13 IC1.20 IC1.31 IC1.35 IC1.41 IC1.47 IC1.57 IC1.68 IC1.79 IC1.95 R5.1 S1.1 S1.2 U1.1 U2.3 U2.5 U2.6 X1.GND X1.MOUNT X6.1 | length 6.1
  Top Layer w0.2: IC1.95 54.508,72.758 v1(55.25,73.5) ; IC1.68 58.826,82.744 59.25,82.32 v1(59.25,82.194) ; IC1.57 64.376,83.946 64.376,83.124 v1(65.25,82.25)
  other v1: 59,62 66.5,62 59,63.5 66.5,63.5 59,65 66.5,65 58.75,70.25 64.5,70.25 76.25,74.5 48,76 49.5,76 51,76 76.25,76 76.25,77.5 76.25,79 55.5,79.25 62.25,80.25 76.25,80.5 58,88 64,88
NetC4_2: C4.2 R6.1 Y1.1 | length 7.1
  Top Layer w0.2: Y1.1 51.169,61.919 51.169,64.333 C4.2 52.336,65.5 R6.1
NetC26_2: C26.2 C27.2 C28.2 C29.2 C30.2 IC1.30 IC1.36 IC1.42 IC1.48 R4.2 | length 25.5
  Top Layer w0.2: IC1.30 72.758,72.258 R4.2 R4.2@73.1,72.6 ; IC1.36 70.848,75.258 71.606,74.5 C27.2 ; IC1.42 70.873,78.258 71.631,77.5 C28.2 ; IC1.48 70.873,81.258 71.631,80.5 C30.2
  Top Layer w0.6: R4.2@73.1,72.6 73.1,74.4 C27.2 C26.2 C28.2 C29.2 C30.2
NetC31_2: C31.2 IC1.56 | length 2.8
  Top Layer w0.2: IC1.56 64.826,85.076 65.5,85.75 C31.2
NetC32_2: C32.2 IC1.67 | length 2.6
  Top Layer w0.2: IC1.67 59.326,85.206 59.6,85.48 C32.2
NetC33_2: C33.2 IC1.94 | length 2.8
  Top Layer w0.2: C33.2 51.903,73.8 52.445,73.258 IC1.94
NetD1_1: D1.1 L1.2 U2.2 | length 15.4
  Top Layer w0.7: D1.1 L1.2 35.808,119.042 35.808,118.192 40.298,113.702 U2.2
NetD2_1: D2.1 R2.1 | length 1.9
  Top Layer w0.7: D2.1 R2.1
NetD3_1: D3.1 R3.1 | length 1.9
  Top Layer w0.7: D3.1 R3.1
NetIC1_1: IC1.1 X2.1 | length 10
  Top Layer w0.2: X2.1 49.75,69.5 52,67.25 55.241,67.25 55.326,67.335 IC1.1
NetIC1_77: IC1.77 X3.1 | length 7
  Top Layer w0.2: X3.1@52.75,87.5 52.75,87.25 52.25,86.75 52.25,82.25 52.742,81.758 IC1.77
NetIC1_90: IC1.90 R5.2 S2.2 | length 23.8
  Top Layer w0.2: R5.2 v1(42.25,67) ; IC1.90 55.492,75.258 v1(55.5,75.25)
  Top Layer w0.6: S2.2 R5.2
  Bottom Layer w0.2: v1(42.25,67) 44.25,67 52.5,75.25 v1(55.5,75.25)
NRST: C3.2 IC1.7 R1.1 S1.3 S1.4 X8.1 | length 52.8
  Top Layer w0.2: S1.3 S1.4 R1.1 C3.2 ; X8.1 27.75,84.75 27.75,81.412 35.662,73.5 C3.2 ; IC1.7 58.326,69.424 58,69.75 55,69.75 54.56,69.31 51.375,69.31 47.185,73.5 C3.2
OSC_IN: C5.2 IC1.5 Y1.2 | length 13.1
  Top Layer w0.2: Y1.2 47.768,65.419 50.083,65.419 C5.2 51.414,66.75 56.5,66.75 57.326,67.576 IC1.5
OSC_OUT: IC1.6 R6.2 | length 3.8
  Top Layer w0.2: R6.2@55.957,65.457 57.826,67.326 IC1.6
SWCLK: IC1.65 X5.1 | length 36.9
  Top Layer w0.2: X5.1 53.544,93.75 60.326,86.968 IC1.65
SWDIO: IC1.64 X7.1 | length 37.5
  Top Layer w0.2: X7.1 v1(33.5,88.75) ; v1(59.25,90.25) 60.826,88.674 IC1.64
  GND w0.2: v1(33.5,88.75) v1@33.604,88.854
  Bottom Layer w0.2: v1@33.604,88.854 57.854,88.854 v1(59.25,90.25)
SWO: IC1.91 X9.1 | length 28.1
  Top Layer w0.2: X9.1 36.821,83.75 45.813,74.758 IC1.91
VCC: C1.1 C2.1 C34.1 C35.1 C36.1 C37.1 C38.1 F.2 U2.1 | length 31.1
  Top Layer w2: U2.1 44,115.654 44,120.367 45.133,121.5 C1.1 C34.1 C35.1 C36.1 C37.1 C38.1 63.6,121.6 F.2
VIN: F.1 X1.VIN | length 3.6
  Top Layer w2: F.1@69.579,118.879 X1.VIN
pads on no net: IC1.2 IC1.3 IC1.4 IC1.10 IC1.11 IC1.16 IC1.17 IC1.18 IC1.19 IC1.21 IC1.22 IC1.24 IC1.25 IC1.26 IC1.27 IC1.28 IC1.29 IC1.32 IC1.33 IC1.34 IC1.37 IC1.38 IC1.39 IC1.40 IC1.43 IC1.44 IC1.45 IC1.46 IC1.49 IC1.50 IC1.51 IC1.52 IC1.53 IC1.54 IC1.55 IC1.59 IC1.60 IC1.61 IC1.62 IC1.63 IC1.66 IC1.70 IC1.71 IC1.72 IC1.73 IC1.74 IC1.75 IC1.76 IC1.80 IC1.81 IC1.83 IC1.84 IC1.86 IC1.87 IC1.88 IC1.89 IC1.92 IC1.93 IC1.97 IC1.98 IC1.99 IC1.100

## Polygon pours and split planes (outlines as drawn)
GND on Top Layer "GND_L01_P000" (solid, pour order 0): 21,130 93,130 93,51 20,51
GND on Bottom Layer "GND_L04_P001" (solid, pour order 1): 21.587,130.475 92.587,130.475 92.587,54.475 21.587,54.475
GND on GND "GND_L02_P002" (solid, pour order 2): 21,128 21,53 91,53 91,128
+3V3 on +3V3 "+3V3_L03_P003" (solid, pour order 3): 24,127 24,54 93,54 93,127

## Keep-outs
Keep-Out Layer:
  lines w0.2: 25,60 ccw(c29,60) 29,56 ; 25,60 ccw(c29,60) 29,56 ; 25,60 25,122.5 ; 25,60 25,122.5 ; 25,122.5 cw(c28.5,122.5) 28.5,126 ; 25,122.5 cw(c28.5,122.5) 28.5,126 ; 28.5,126 81.5,126 ; 28.5,126 81.5,126 ; 29,56 81,56 ; 29,56 81,56 ; 81,56 ccw(c81,60.75) 85.75,60.75 ; 81,56 ccw(c81,60.75) 85.75,60.75 ; 81.5,126 cw(c81.5,121.75) 85.75,121.75 ; 81.5,126 cw(c81.5,121.75) 85.75,121.75 ; 85.75,60.75 85.75,121.75 ; 85.75,60.75 85.75,121.75

## Text inside footprints (layer, text, board x,y; h text height)
D2: Top Overlay "*" at 76.5,102.4 h1.52 r180
D3: Top Overlay "*" at 76.5,107.25 h1.52 r180